# EAGLE board untitled2 (EAGLE 7.6.0)

Size 100 x 53 mm. Coordinates in mm from the lower left corner, seen from the top.
Outline: 0,0 0,53 100,53 100,0 0,0
Copper layers (1*16): Top 0.035mm / dielectric 1.5mm / Bottom 0.035mm
Design rules "default": minimum track width 10mil, minimum drill 24mil, track to track 8mil, track to pad 8mil, pad to pad 8mil, via to via 8mil, smd to smd 8mil, copper to edge 40mil, drill to drill 8mil, minimum pad ring 10mil, minimum via ring 8mil, stop-mask expansion 4mil, vias tented up to drill 0mil, thermal gap 10mil

## Footprints (pad centres in the part's own frame; a part is rotated, then mirrored left to right if it is on the bottom)
C5B2.5 = drill 0.813 pad 1.6 octagon: 1 -2.54,0; 2 2.54,0
HSIP10 = drill 0.8 long: 1 -11.43,0; 2 -8.89,0; 3 -6.35,0; 4 -3.81,0; 5 -1.27,0; 6 1.27,0; 7 3.81,0; 8 6.35,0; 9 8.89,0; 10 11.43,0
MA05-1 = drill 1.016 long: 1 -5.08,0; 2 -2.54,0; 3 0,0; 4 2.54,0; 5 5.08,0
MA06-1 = drill 1.016 long: 1 -6.35,0; 2 -3.81,0; 3 -1.27,0; 4 1.27,0; 5 3.81,0; 6 6.35,0
TL3XPO = drill 1.1 pad 1.422 long: 1 -2.54,0; 2 0,0; 3 2.54,0
MA08-1 = drill 1.016 long: 1 -8.89,0; 2 -6.35,0; 3 -3.81,0; 4 -1.27,0; 5 1.27,0; 6 3.81,0; 7 6.35,0; 8 8.89,0
MA10-1 = drill 1.016 long: 1 -11.43,0; 2 -8.89,0; 3 -6.35,0; 4 -3.81,0; 5 -1.27,0; 6 1.27,0; 7 3.81,0; 8 6.35,0; 9 8.89,0; 10 11.43,0
MA18-2 = drill 1.016 octagon: 1 -21.59,-1.27; 2 -21.59,1.27; 3 -19.05,-1.27; 4 -19.05,1.27; 5 -16.51,-1.27; 6 -16.51,1.27; 7 -13.97,-1.27; 8 -13.97,1.27; 9 -11.43,-1.27; 10 -11.43,1.27; 11 -8.89,-1.27; 12 -8.89,1.27; 13 -6.35,-1.27; 14 -6.35,1.27; 15 -3.81,-1.27; 16 -3.81,1.27; 17 -1.27,-1.27; 18 -1.27,1.27; 19 1.27,-1.27; 20 1.27,1.27; 21 3.81,-1.27; 22 3.81,1.27; 23 6.35,-1.27; 24 6.35,1.27; 25 8.89,-1.27; 26 8.89,1.27; 27 11.43,-1.27; 28 11.43,1.27; 29 13.97,-1.27; 30 13.97,1.27; 31 16.51,-1.27; 32 16.51,1.27; 33 19.05,-1.27; 34 19.05,1.27; 35 21.59,-1.27; 36 21.59,1.27
MA05-2 = drill 1.016 octagon: 1 -5.08,-1.27; 2 -5.08,1.27; 3 -2.54,-1.27; 4 -2.54,1.27; 5 0,-1.27; 6 0,1.27; 7 2.54,-1.27; 8 2.54,1.27; 9 5.08,-1.27; 10 5.08,1.27
332-02 = drill 0.9 pad 1.27: 1 0,-1; 2 0,1

## Placement (x,y rotation side)
C1  0.1uF  [C5B2.5]  74.3,36.2 90 top
C2  0.1uF  [C5B2.5]  22.86,35.56 90 top
C3  0.1uF  [C5B2.5]  22.86,15.24 90 top
DRIVER1  TA7291  [HSIP10]  60.33,24.61 0 top
DRIVER2  TA7291  [HSIP10]  60.33,13.9 0 top
IMU  [MA05-1]  80.01,43.81 180 top
MOTOR1  [MA06-1]  27.94,35.56 90 top
MOTOR2  [MA06-1]  27.94,16.51 90 top
S3  TL39PO  [TL3XPO]  59.05,40.64 90 top
SV1  [MA08-1]  36.83,2.54 180 top
SV2  [MA08-1]  59.69,2.54 180 top
SV3  [MA08-1]  82.55,2.54 180 top
SV4  [MA08-1]  77.47,49.53 0 top
SV5  [MA08-1]  54.61,49.53 0 top
SV6  [MA10-1]  29.21,49.53 0 top
SV7  [MA18-2]  95.25,26.67 90 top
VS-C3  [MA05-2]  11.43,35.56 270 top
X3  332-02  [332-02]  67.31,40.01 180 top

## Library data of the parts
C1-C3 = capacitor-wima
DRIVER1 DRIVER2 = TA7291P
IMU MOTOR1 MOTOR2 SV1-SV7 VS-C3 = con-lstb; OC_FARNELL: unknown; OC_NEWARK: unknown
S3 = switch
X3 = con-garry

## Nets
ENCODER: IMU.5 SV4.6
GND: C1.2 DRIVER1.1 DRIVER2.1 IMU.2 MOTOR1.6 MOTOR2.6 SV1.3 VS-C3.10 X3.1
N$1: C2.1 DRIVER1.2 MOTOR1.3
N$2: C2.2 DRIVER1.10 MOTOR1.4
N$3: C3.1 DRIVER2.2 MOTOR2.3
N$4: C3.2 DRIVER2.10 MOTOR2.4
N$5: IMU.1 SV7.36
N$6: MOTOR2.1 SV5.6
N$7: DRIVER1.7 DRIVER2.7 MOTOR1.5 MOTOR2.5 SV1.4
N$8: IMU.3 SV4.8
N$9: IMU.4 SV4.7
N$10: C1.1 DRIVER1.8 DRIVER2.8 S3.1 SV1.1
N$11: DRIVER2.4 SV7.10
N$12: DRIVER1.5 SV7.16
N$13: MOTOR1.1 SV5.5
N$14: MOTOR1.2 SV7.26
N$15: MOTOR2.2 SV7.24
N$16: DRIVER1.6 SV7.14
N$17: DRIVER2.5 SV7.8
N$18: DRIVER2.6 SV7.6
N$19: SV1.5 VS-C3.9
N$20: SV6.5 VS-C3.3
N$21: SV6.6 VS-C3.4
N$22: SV5.3 VS-C3.5
N$23: SV6.1 VS-C3.6
N$24: DRIVER1.4 SV7.12
VCC: S3.2 X3.2

## Tracks (layer width: path | path; a pad name or v marks a point on that pad's centre or on a via)
ENCODER  (1 unrouted)
GND  (8 unrouted)
N$1  (2 unrouted)
N$2  (2 unrouted)
N$3  (2 unrouted)
N$4  (2 unrouted)
N$5  (1 unrouted)
N$6  (1 unrouted)
N$7  (4 unrouted)
N$8  (1 unrouted)
N$9  (1 unrouted)
N$10  (4 unrouted)
N$11  (1 unrouted)
N$12  (1 unrouted)
N$13  (1 unrouted)
N$14  (1 unrouted)
N$15  (1 unrouted)
N$16  (1 unrouted)
N$17  (1 unrouted)
N$18  (1 unrouted)
N$19  (1 unrouted)
N$20  (1 unrouted)
N$21  (1 unrouted)
N$22  (1 unrouted)
N$23  (1 unrouted)
N$24  (1 unrouted)
VCC  (1 unrouted)